# Altium PCB Sinistro_ASP_RevA.PcbDoc (part 3 of 5)
Units mm, origin at the board's own origin, x right, y up, seen from the top; angles counter-clockwise.
Board outline 150 x 110 mm, 8 copper layers (Top Layer (.GTL), MidLayer1 (.G1), +28V and VCC (.GP1), A and D grounds (.GP2), Earth GND (.GP3), +5ANA (.GP4), -5ANA (.GP5), Bottom Layer (.GBL)); 383 components, 275 nets, 1751 pads, 521 vias.
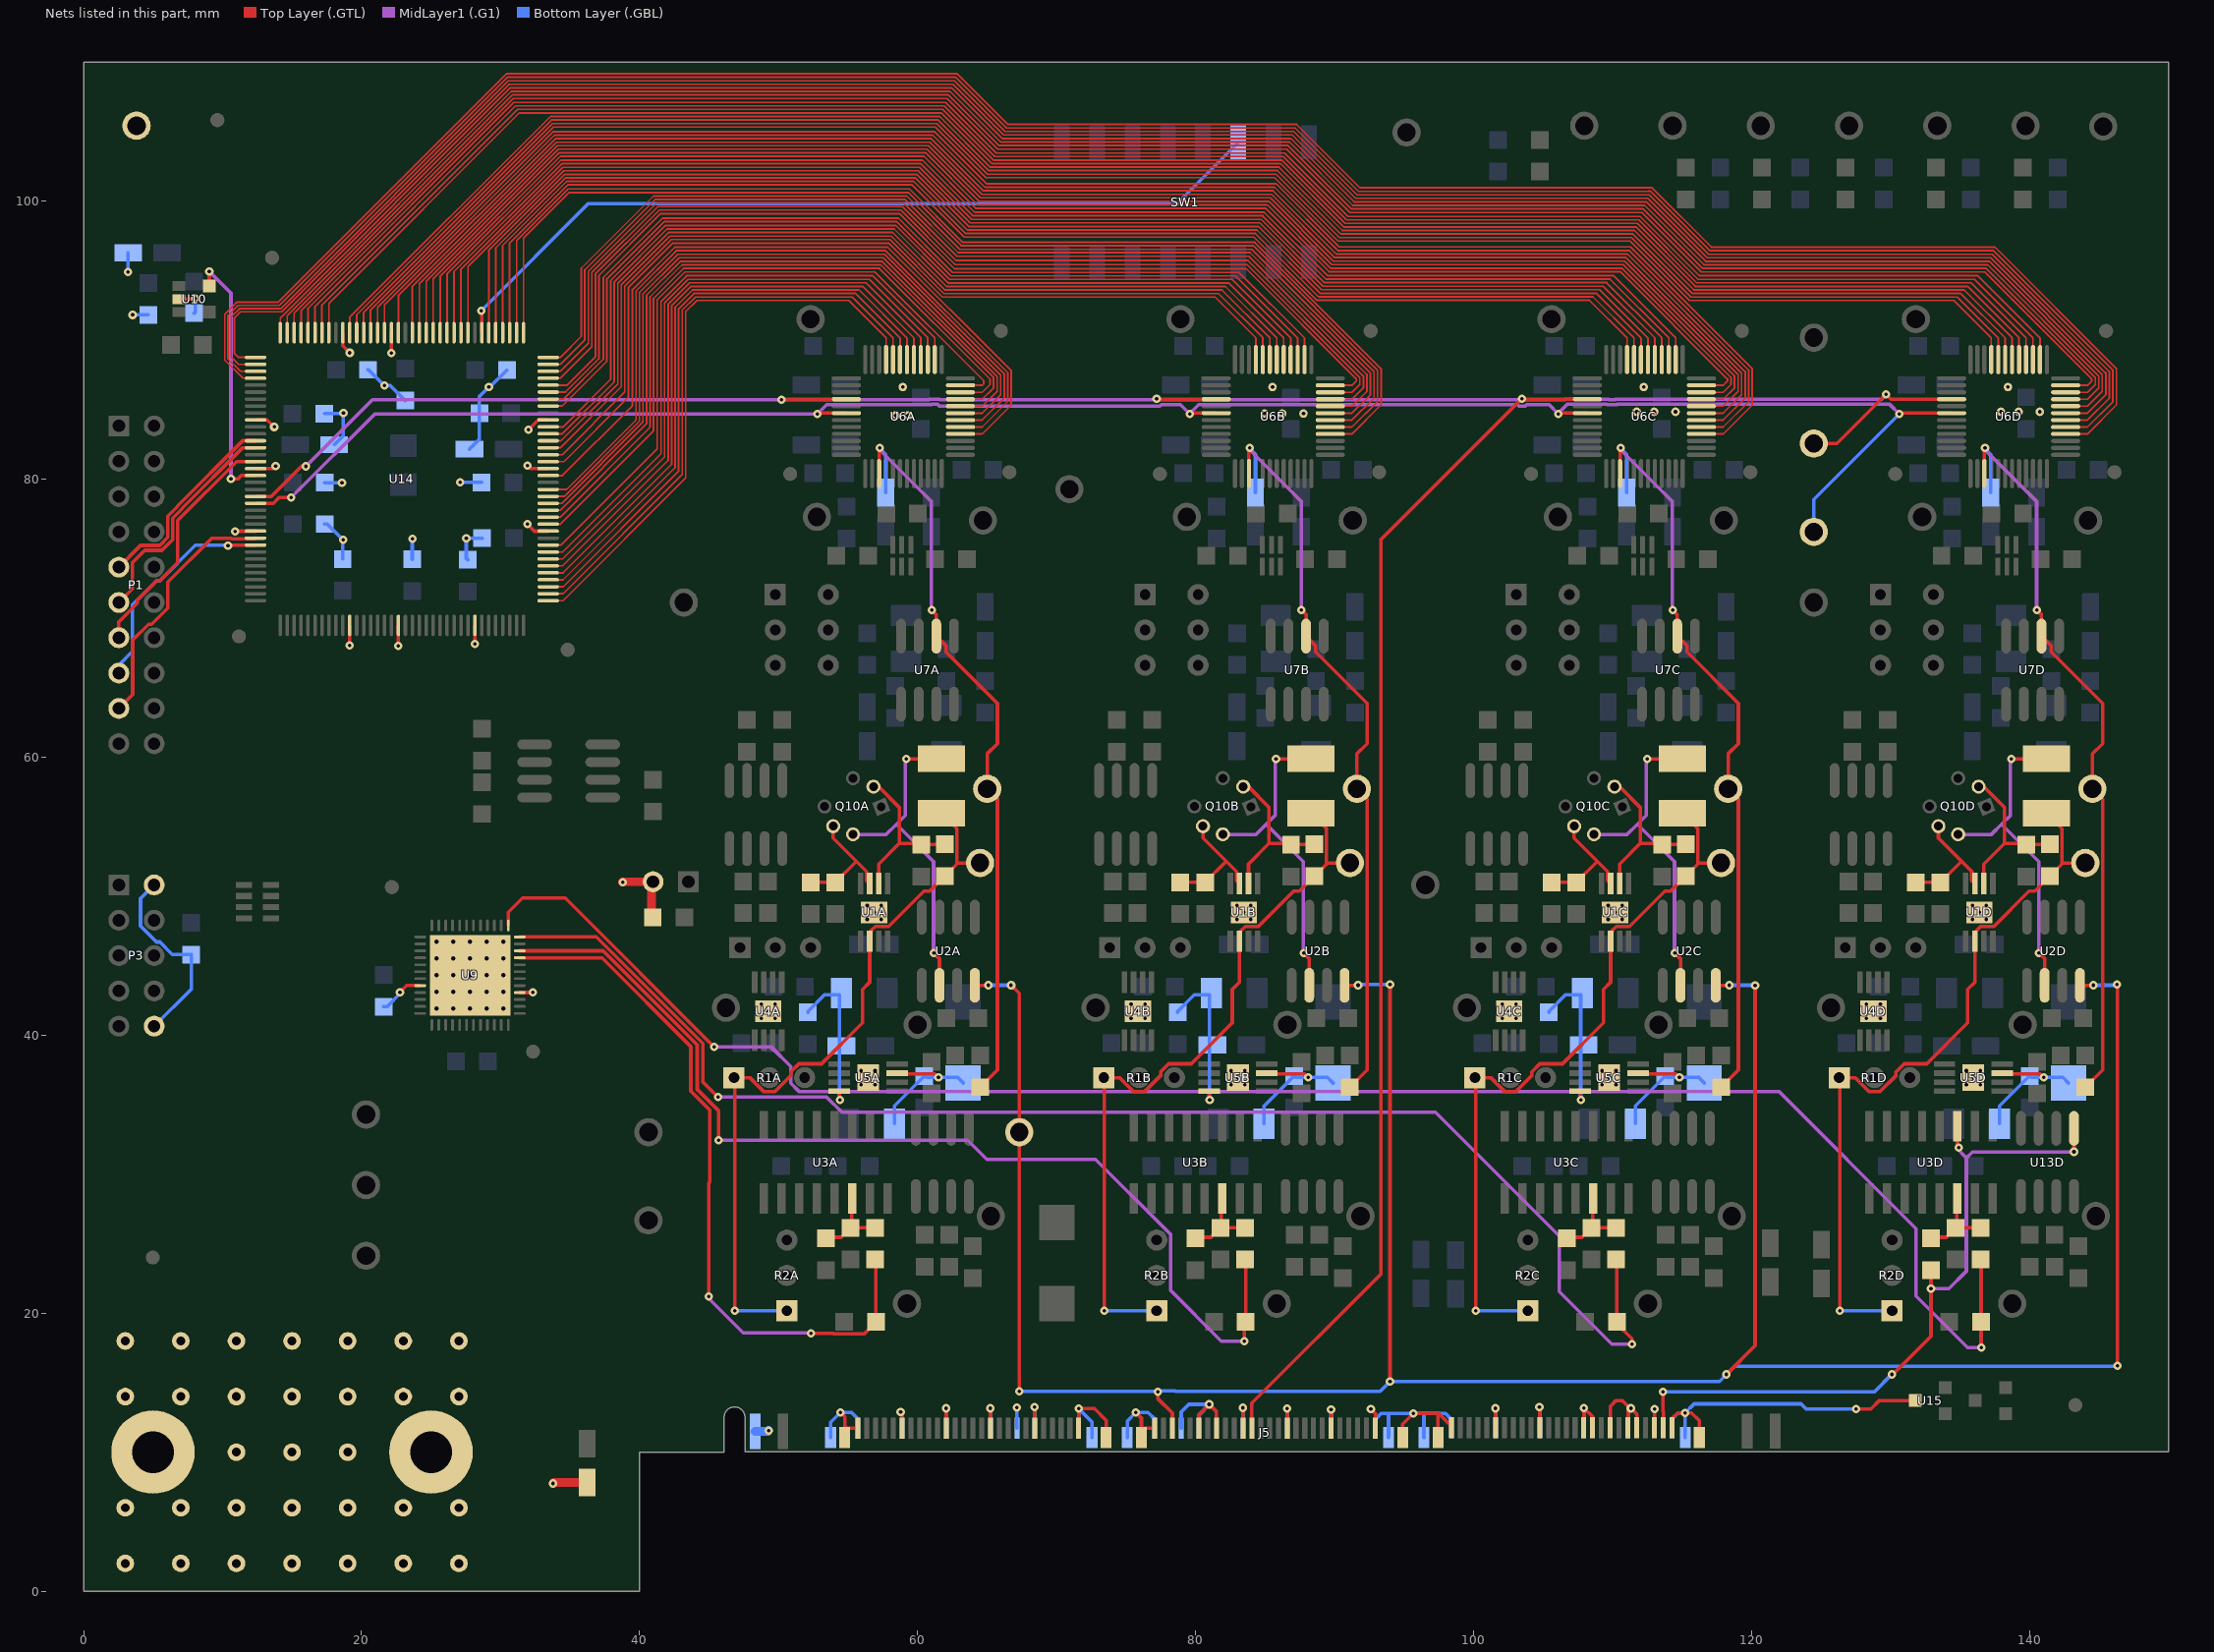
[diagram p9: the nets of this part, all layers, seen from the top]

## Via types
v1: diameter 0.61, hole 0.254, Top Layer (.GTL) to Bottom Layer (.GBL), 521 vias

## Nets (pads, with @x,y where several pads share a name; then routed paths per layer and width w, separated by ;. In a path a pad name is that pad's centre, name@x,y a point inside that pad or via, vN(x,y) a via of type N, cw(c..) or ccw(c..) an arc to the next point about the centre after c; other vN are vias at no path point) (continued)
CH4_OUT: J5.3 R13D.1 U3D.3 U13D.1 | length 51.8
  Top Layer (.GTL) w0.254: v1(113.614,14.351) 113.614,12.949 113.637,12.926 J5.3@113.637,11.756 ; v1@130.099,15.545 132.893,18.339 v1(132.893,21.776) R13D.1@132.893,23.097 ; U3D.3@134.798,33.444 134.798,31.834 134.864,31.9 v1(134.9,31.9) ; v1(143.18,31.606) U13D.1@143.18,33.294
  MidLayer1 (.G1) w0.254: v1@132.875,21.769 134.195,21.769 135.44,23.014 135.44,31.167 ; v1@134.78,31.828 135.44,31.167 ; v1@143.162,31.599 135.872,31.599 135.44,31.167
  Bottom Layer (.GBL) w0.254: v1(113.614,14.351) 114.122,14.351 128.829,14.351 v1(130.073,15.596)
CLK_100: U10.5 U14.18 | length 18.6
  Top Layer (.GTL) w0.254: U10.5@9.046,93.885 v1(9.046,94.926) ; v1@10.6,80.1 v1(10.6,80) 11.1,80 11.35,80.25 U14.18@12.375,80.25
  MidLayer1 (.G1) w0.254: v1(9.046,94.926) 10.6,93.372 v1(10.6,80)
CLK_ENBL: P1.15 U14.28 | length 16
  Top Layer (.GTL) w0.254: v1(10.389,75.209) 10.429,75.25 U14.28@12.375,75.25
  Bottom Layer (.GBL) w0.254: P1.15@2.54,66.04 2.54,66.623 3.519,67.601 3.519,70.943 5.257,72.681 5.485,72.681 8.039,75.235 10.414,75.235 v1(10.389,75.209)
COMMOUTA: C48A.1 R7A.2 TP9A.1 U6A.3 U7A.2 | length 55.7
  Top Layer (.GTL) w0.254: U6A.3@57.231,80.389 v1@57.231,82.18 ; v1(61.013,70.569) 61.343,70.239 U7A.2@61.343,68.701 62.035,68.01 62.035,67.562 65.738,63.859 65.738,60.968 65.001,60.232 TP9A.1@65.001,57.717 65.738,56.98 65.738,37.499 R7A.2@64.493,36.254
  MidLayer1 (.G1) w0.254: v1@57.213,82.173 60.995,78.391 v1@60.995,70.563
  Bottom Layer (.GBL) w0.254: v1@57.261,82.221 57.693,81.789 C48A.1@57.693,79.021
  other v1: 57.279,82.228
COMMOUTB: C48B.1 R7B.2 TP9B.1 U6B.3 U7B.2 | length 55.7
  Top Layer (.GTL) w0.254: U6B.3@83.831,80.389 v1@83.831,82.18 ; v1(87.613,70.569) 87.943,70.239 U7B.2@87.943,68.701 88.635,68.01 88.635,67.562 92.338,63.859 92.338,60.968 91.601,60.232 TP9B.1@91.601,57.717 92.338,56.98 92.338,37.499 R7B.2@91.093,36.254
  MidLayer1 (.G1) w0.254: v1@83.813,82.173 87.595,78.391 v1@87.595,70.563
  Bottom Layer (.GBL) w0.254: v1@83.861,82.221 84.293,81.789 C48B.1@84.293,79.021
  other v1: 83.879,82.228
COMMOUTC: C48C.1 R7C.2 TP9C.1 U6C.3 U7C.2 | length 55.7
  Top Layer (.GTL) w0.254: U6C.3@110.531,80.389 v1@110.531,82.18 ; v1(114.313,70.569) 114.643,70.239 U7C.2@114.643,68.701 115.335,68.01 115.335,67.562 119.038,63.859 119.038,60.968 118.301,60.232 TP9C.1@118.301,57.717 119.038,56.98 119.038,37.499 R7C.2@117.793,36.254
  MidLayer1 (.G1) w0.254: v1@110.513,82.173 114.295,78.391 v1@114.295,70.563
  Bottom Layer (.GBL) w0.254: v1@110.561,82.221 110.993,81.789 C48C.1@110.993,79.021
  other v1: 110.579,82.228
COMMOUTD: C48D.1 R7D.2 TP9D.1 U6D.3 U7D.2 | length 55.7
  Top Layer (.GTL) w0.254: U6D.3@136.731,80.389 v1@136.731,82.18 ; v1(140.513,70.569) 140.843,70.239 U7D.2@140.843,68.701 141.535,68.01 141.535,67.562 145.238,63.859 145.238,60.968 144.501,60.232 TP9D.1@144.501,57.717 145.238,56.98 145.238,37.499 R7D.2@143.993,36.254
  MidLayer1 (.G1) w0.254: v1@136.713,82.173 140.495,78.391 v1@140.495,70.563
  Bottom Layer (.GBL) w0.254: v1@136.761,82.221 137.193,81.789 C48D.1@137.193,79.021
  other v1: 136.779,82.228
CONVST_N: J5.81 TP26.1 U6A.40 U6B.40 U6C.40 U6D.40 U14.21 | length 227.9
  Top Layer (.GTL) w0.254: U14.21@12.375,78.75 13.523,78.75 15.684,80.912 v1(15.989,80.912) ; v1@50.208,85.739 U6A.40@54.881,85.739 ; v1@77.191,85.739 U6B.40@81.481,85.739 ; J5.81@84.038,11.729 84.038,13.527 ; 84.049,13.538 84.038,13.527 ; 93.32,22.885 93.32,22.809 ; v1@103.454,85.776 93.345,75.667 93.32,75.641 93.32,73.736 93.32,22.809 ; v1@103.48,85.739 U6C.40@108.181,85.739 ; TP26.1@124.46,82.55 126.136,82.55 v1(129.667,86.081) 130.009,85.739 U6D.40@134.381,85.739 ; 84.038,13.527 93.32,22.809
  MidLayer1 (.G1) w0.254: v1(15.989,80.912) 20.785,85.708 v1(50.208,85.708) 60.831,85.708 60.848,85.725 61.584,85.725 61.601,85.708 77.123,85.708 v1(77.191,85.776) 77.259,85.708 103.412,85.708 v1(103.48,85.776) 103.48,85.75 103.522,85.708 106.566,85.708 106.584,85.725 109.706,85.725 109.723,85.708 110.165,85.708 110.183,85.725 129.311,85.725 v1(129.667,86.081)
  Bottom Layer (.GBL) w0.254: v1@103.454,85.776 v1(103.48,85.776)
CS_N: TP23.1 U6A.42 U6B.42 U6C.42 U6D.42 U14.22 | length 143.8
  Top Layer (.GTL) w0.254: U14.22@12.393,78.232 U14.22@12.375,78.25 13.658,78.25 14.072,78.664 v1(14.935,78.664) ; v1@52.781,84.739 U6A.42@54.881,84.739 ; v1@79.578,84.739 U6B.42@81.481,84.739 ; v1@106.096,84.739 U6C.42@108.181,84.739 ; v1(130.607,84.684) 130.607,84.739 U6D.42@134.381,84.739
  MidLayer1 (.G1) w0.254: v1(14.935,78.664) 20.955,84.684 v1(52.781,84.684) 53.45,85.352 60.978,85.352 60.995,85.369 61.437,85.369 61.564,85.242 77.412,85.242 77.521,85.352 78.91,85.352 v1(79.578,84.684) 79.578,84.709 80.221,85.352 103.149,85.352 103.259,85.242 103.701,85.242 103.81,85.352 105.427,85.352 v1(106.096,84.684) 106.096,84.734 106.731,85.369 109.559,85.369 109.576,85.352 110.313,85.352 110.33,85.369 129.921,85.369 v1(130.607,84.684)
  Bottom Layer (.GBL) w0.254: TP23.1@124.46,76.2 124.46,78.537 v1(130.607,84.684)
DAT_STB: P1.9 U14.13 | length 14.5
  Top Layer (.GTL) w0.254: P1.9@2.54,73.66 4.101,75.221 5.485,75.221 6.059,75.795 6.059,77.329 6.77,78.04 6.77,78.071 11.449,82.75 U14.13@12.375,82.75
DB0: U6A.33 U14.73 | length 42.9
  Top Layer (.GTL) w0.127: U14.73@33.425,71.25 34.496,71.25 43.319,80.072 43.319,92.044 44.113,92.838 55.045,92.838 57.731,90.152 U6A.33@57.731,88.589
DB1: U6A.32 U14.74 | length 43.4
  Top Layer (.GTL) w0.127: U14.74@33.425,71.75 34.496,71.75 43.065,80.318 43.065,92.15 44.007,93.092 55.291,93.092 58.231,90.152 U6A.32@58.231,88.589
DB2: U6A.31 U14.75 | length 43.8
  Top Layer (.GTL) w0.127: U14.75@33.425,72.25 34.286,72.25 34.496,72.25 42.811,80.564 42.811,92.255 43.902,93.346 55.537,93.346 58.731,90.152 U6A.31@58.731,88.589
DB3: U6A.30 U14.76 | length 44.2
  Top Layer (.GTL) w0.127: U14.76@33.425,72.75 34.286,72.75 34.496,72.75 42.557,80.81 42.557,92.36 43.797,93.6 55.783,93.6 59.231,90.152 U6A.30@59.231,88.589
DB4: U6A.29 U14.77 | length 44.6
  Top Layer (.GTL) w0.127: U14.77@33.425,73.25 34.286,73.25 34.496,73.25 42.303,81.056 42.303,92.465 43.692,93.854 56.029,93.854 59.731,90.152 U6A.29@59.731,88.589
DB5: U6A.28 U14.78 | length 45
  Top Layer (.GTL) w0.127: U14.78@33.425,73.75 34.286,73.75 34.46,73.75 42.049,81.338 42.049,92.571 43.586,94.108 56.275,94.108 60.231,90.152 U6A.28@60.231,88.589
DB6: U6A.27 U14.79 | length 45.4
  Top Layer (.GTL) w0.127: U14.79@33.425,74.25 34.286,74.25 34.46,74.25 41.795,81.584 41.795,92.676 43.481,94.362 56.521,94.362 60.731,90.152 U6A.27@60.731,88.589
DB7: U6A.26 U14.80 | length 45.9
  Top Layer (.GTL) w0.127: U14.80@33.425,74.75 34.286,74.75 34.46,74.75 41.541,81.83 41.541,92.781 43.376,94.616 56.767,94.616 61.231,90.152 U6A.26@61.231,88.589
DB8: U6A.23 U14.81 | length 50.9
  Top Layer (.GTL) w0.127: U14.81@33.425,75.25 34.336,75.25 41.261,82.175 41.261,92.897 43.26,94.896 56.924,94.896 64.76,87.06 64.76,86.854 64.645,86.739 U6A.23@63.081,86.739
DB9: U6A.22 U14.84 | length 51
  Top Layer (.GTL) w0.127: U14.84@33.425,76.75 34.286,76.75 41.007,83.471 41.007,93.002 43.156,95.151 57.249,95.151 57.25,95.15 65.211,87.189 65.211,86.805 64.645,86.239 U6A.22@63.081,86.239
DB10: U6A.21 U14.85 | length 51.9
  Top Layer (.GTL) w0.127: U14.85@33.425,77.25 34.286,77.25 40.753,83.717 40.753,93.107 43.051,95.405 57.352,95.405 57.352,95.404 65.465,87.291 65.466,87.29 65.466,86.56 64.645,85.739 U6A.21@63.081,85.739
DB11: U6A.20 U14.86 | length 52.7
  Top Layer (.GTL) w0.127: U14.86@33.425,77.75 34.286,77.75 40.499,83.963 40.499,93.212 42.946,95.659 57.421,95.659 65.72,87.36 65.72,86.314 64.645,85.239 U6A.20@63.081,85.239
DB12: U6A.19 U14.87 | length 53.6
  Top Layer (.GTL) w0.127: U14.87@33.425,78.25 34.398,78.25 40.245,84.097 40.245,93.317 42.839,95.912 57.535,95.912 65.973,87.474 65.973,86.067 64.645,84.739 U6A.19@63.081,84.739
DB13: U6A.18 U14.88 | length 54.6
  Top Layer (.GTL) w0.127: U14.88@33.425,78.75 34.575,78.75 39.991,84.166 39.991,93.423 42.734,96.166 57.636,96.166 66.227,87.575 66.227,85.821 64.645,84.239 U6A.18@63.081,84.239
DB14: U6A.17 U14.89 | length 55.5
  Top Layer (.GTL) w0.127: U14.89@33.425,79.25 34.752,79.25 39.737,84.236 39.737,93.528 42.63,96.421 57.704,96.421 66.482,87.643 66.482,85.576 64.645,83.739 U6A.17@63.081,83.739
DB15: U6A.16 U14.91 | length 55.7
  Top Layer (.GTL) w0.127: U14.91@33.425,80.25 34.454,80.25 39.483,85.279 39.483,93.633 42.524,96.674 57.846,96.674 66.735,87.785 66.735,85.329 64.645,83.239 U6A.16@63.081,83.239
DB16: U6B.33 U14.93 | length 66.4
  Top Layer (.GTL) w0.127: U14.93@33.425,81.25 34.565,81.25 39.191,85.876 39.191,93.754 42.403,96.966 57.897,96.966 61.779,93.084 81.399,93.084 84.331,90.152 U6B.33@84.331,88.589
DB17: U6B.32 U14.94 | length 66.8
  Top Layer (.GTL) w0.127: U14.94@33.425,81.75 34.43,81.75 38.937,86.257 38.937,93.859 42.298,97.22 58.002,97.22 61.884,93.338 81.645,93.338 84.831,90.152 U6B.32@84.831,88.589
DB18: U6B.31 U14.95 | length 67.1
  Top Layer (.GTL) w0.127: U14.95@33.425,82.25 34.295,82.25 38.683,86.638 38.683,93.965 42.192,97.474 58.108,97.474 61.99,93.592 81.891,93.592 85.331,90.152 U6B.31@85.331,88.589
DB19: U6B.30 U14.96 | length 67.5
  Top Layer (.GTL) w0.127: U14.96@33.425,82.75 34.338,82.75 38.429,86.841 38.429,94.07 42.087,97.728 58.213,97.728 62.095,93.846 82.137,93.846 85.831,90.152 U6B.30@85.831,88.589
DB20: U6B.29 U14.97 | length 68
  Top Layer (.GTL) w0.127: U14.97@33.425,83.25 34.431,83.25 38.175,86.994 38.175,94.175 41.982,97.982 58.318,97.982 62.2,94.1 82.383,94.1 86.331,90.152 U6B.29@86.331,88.589
DB21: U6B.28 U14.98 | length 68.5
  Top Layer (.GTL) w0.127: U14.98@33.425,83.75 34.499,83.75 37.921,87.172 37.921,94.28 41.877,98.236 58.423,98.236 62.305,94.354 82.629,94.354 86.831,90.152 U6B.28@86.831,88.589
DB22: U6B.27 U14.101 | length 67.9
  Top Layer (.GTL) w0.127: U14.101@33.425,85.25 34.425,85.25 37.649,88.474 37.649,94.393 41.764,98.508 58.51,98.508 62.411,94.607 62.584,94.607 ; U6B.27@87.331,88.589 87.331,90.152 82.875,94.608 62.585,94.608 ; 62.584,94.607 62.585,94.608
DB23: U6B.26 U14.102 | length 68.4
  Top Layer (.GTL) w0.127: U14.102@33.425,85.75 34.518,85.75 37.395,88.627 37.395,94.498 41.659,98.762 58.616,98.762 62.516,94.862 83.121,94.862 87.831,90.152 U6B.26@87.831,88.589
DB24: U6B.23 U14.103 | length 74
  Top Layer (.GTL) w0.127: U14.103@33.425,86.25 34.663,86.25 37.073,88.66 37.073,94.631 41.526,99.084 58.679,99.084 62.643,95.12 83.637,95.12 91.557,87.2 91.557,87.051 91.245,86.739 U6B.23@89.681,86.739
DB25: U6B.22 U14.104 | length 74.9
  Top Layer (.GTL) w0.127: U14.104@33.425,86.75 34.782,86.75 36.819,88.787 36.819,94.737 41.421,99.339 58.783,99.339 62.702,95.42 83.696,95.42 91.812,87.304 91.812,87.131 91.811,87.13 91.811,87.12 91.812,87.119 91.812,86.806 91.245,86.239 U6B.22@89.681,86.239
DB26: U6B.21 U14.105 | length 75.5
  Top Layer (.GTL) w0.127: U14.105@33.425,87.25 34.286,87.25 36.565,89.529 36.565,94.842 41.315,99.592 58.89,99.592 62.762,95.72 83.755,95.72 92.065,87.41 92.065,86.559 91.245,85.739 U6B.21@89.681,85.739
DB27: U6B.20 U14.106 | length 76.3
  Top Layer (.GTL) w0.127: U14.106@33.425,87.75 34.286,87.75 36.311,89.775 36.311,94.947 41.21,99.846 58.995,99.846 62.821,96.02 83.814,96.02 92.32,87.514 92.32,86.314 91.245,85.239 U6B.20@89.681,85.239
DB28: U6B.19 U14.107 | length 77.2
  Top Layer (.GTL) w0.127: U14.107@33.425,88.25 34.286,88.25 36.057,90.021 36.057,95.052 41.105,100.1 59.1,100.1 62.914,96.286 83.907,96.286 92.573,87.62 92.573,86.067 91.245,84.739 U6B.19@89.681,84.739
DB29: U6B.18 U14.108 | length 78
  Top Layer (.GTL) w0.127: U14.108@33.425,88.75 34.286,88.75 35.803,90.267 35.803,95.158 40.999,100.354 59.205,100.354 63.039,96.52 84.033,96.52 92.827,87.726 92.827,85.821 91.245,84.239 U6B.18@89.681,84.239
DB30: U6B.17 U14.109 | length 81.3
  Top Layer (.GTL) w0.127: U14.109@31.65,90.525 31.65,97.334 34.924,100.608 59.31,100.608 63.129,96.79 84.122,96.79 93.081,87.831 93.081,85.575 91.245,83.739 U6B.17@89.681,83.739
DB31: U6B.16 U14.110 | length 82.8
  Top Layer (.GTL) w0.127: U14.110@31.15,90.525 31.15,97.158 34.854,100.862 59.416,100.862 63.258,97.02 84.251,97.02 93.335,87.936 93.335,85.329 91.245,83.239 U6B.16@89.681,83.239
DB32: U6C.33 U14.111 | length 94.7
  Top Layer (.GTL) w0.127: U14.111@30.65,90.525 30.65,96.981 34.825,101.156 59.607,101.156 63.357,97.406 84.191,97.406 88.742,92.855 108.329,92.855 111.031,90.152 U6C.33@111.031,88.589
DB33: U6C.32 U14.112 | length 95.8
  Top Layer (.GTL) w0.127: U14.112@30.15,90.525 30.15,96.804 34.755,101.41 59.712,101.41 63.462,97.66 84.296,97.66 88.847,93.109 108.575,93.109 111.531,90.152 U6C.32@111.531,88.589
DB34: U6C.31 U14.113 | length 96.9
  Top Layer (.GTL) w0.127: U14.113@29.65,90.525 29.65,96.628 34.686,101.664 59.818,101.664 63.568,97.913 63.741,97.913 ; U6C.31@112.031,88.589 112.031,90.152 108.821,93.363 89.127,93.363 89.126,93.362 88.954,93.362 84.402,97.914 63.742,97.914 ; 63.741,97.913 63.742,97.914
DB35: U6C.30 U14.114 | length 98
  Top Layer (.GTL) w0.127: U14.114@29.15,90.525 29.15,96.451 34.617,101.918 59.923,101.918 63.673,98.168 84.507,98.168 89.058,93.617 109.067,93.617 112.531,90.152 U6C.30@112.531,88.589
DB36: U6C.29 U14.117 | length 99.5
  Top Layer (.GTL) w0.127: U14.117@27.65,90.525 27.65,95.274 34.548,102.173 60.027,102.173 60.028,102.172 63.778,98.422 63.779,98.423 84.611,98.423 84.612,98.422 89.163,93.871 109.313,93.871 113.031,90.152 U6C.29@113.031,88.589
DB37: U6C.28 U14.118 | length 100.6
  Top Layer (.GTL) w0.127: U14.118@27.15,90.525 27.15,95.097 34.478,102.426 60.133,102.426 63.883,98.676 84.717,98.676 89.268,94.125 109.559,94.125 113.531,90.152 U6C.28@113.531,88.589
DB38: U6C.27 U14.119 | length 101.7
  Top Layer (.GTL) w0.127: U14.119@26.65,90.525 26.65,94.921 34.409,102.68 60.238,102.68 63.988,98.93 84.822,98.93 89.373,94.379 109.805,94.379 114.031,90.152 U6C.27@114.031,88.589
DB39: U6C.26 U14.120 | length 102.9
  Top Layer (.GTL) w0.127: U14.120@26.15,90.525 26.15,94.744 34.34,102.934 60.344,102.934 64.094,99.184 84.928,99.184 89.479,94.633 110.051,94.633 114.531,90.152 U6C.26@114.531,88.589
DB40: U6C.23 U14.121 | length 109
  Top Layer (.GTL) w0.127: U14.121@25.65,90.525 25.65,94.567 34.296,103.213 60.459,103.213 64.209,99.463 85.043,99.463 89.594,94.912 110.545,94.912 118.257,87.2 118.257,87.051 117.945,86.739 U6C.23@116.381,86.739
DB41: U6C.22 U14.122 | length 110.5
  Top Layer (.GTL) w0.127: U14.122@25.15,90.525 25.15,94.391 34.226,103.467 60.565,103.467 64.315,99.717 85.149,99.717 89.7,95.166 110.65,95.166 118.511,87.305 118.511,86.805 117.945,86.239 U6C.22@116.381,86.239
DB42: U6C.21 U14.123 | length 112.1
  Top Layer (.GTL) w0.127: U14.123@24.65,90.525 24.65,94.214 34.157,103.721 60.67,103.721 64.42,99.971 85.254,99.971 89.805,95.42 110.755,95.42 118.765,87.41 118.765,86.559 117.945,85.739 U6C.21@116.381,85.739
DB43: U6C.20 U14.124 | length 113.6
  Top Layer (.GTL) w0.127: U14.124@24.15,90.525 24.15,94.037 34.088,103.975 60.775,103.975 64.525,100.225 85.359,100.225 89.91,95.674 110.86,95.674 119.019,87.515 119.019,86.313 117.945,85.239 U6C.20@116.381,85.239
DB44: U6C.19 U14.125 | length 115.1
  Top Layer (.GTL) w0.127: U14.125@23.65,90.525 23.65,93.86 34.019,104.229 60.88,104.229 64.63,100.479 85.464,100.479 90.015,95.928 110.965,95.928 119.273,87.62 119.273,86.067 117.945,84.739 U6C.19@116.381,84.739
DB45: U6C.18 U14.127 | length 116.9
  Top Layer (.GTL) w0.127: U14.127@22.65,90.525 22.65,93.184 33.949,104.483 60.985,104.483 64.735,100.733 85.569,100.733 90.12,96.182 111.071,96.182 119.527,87.726 119.527,85.821 117.945,84.239 U6C.18@116.381,84.239
DB46: U6C.17 U14.129 | length 118.6
  Top Layer (.GTL) w0.127: U14.129@21.65,90.525 21.65,92.512 33.875,104.737 61.091,104.737 64.841,100.987 85.675,100.987 90.226,96.436 111.176,96.436 119.781,87.831 119.781,85.575 117.945,83.739 U6C.17@116.381,83.739
DB47: U6C.16 U14.130 | length 120.1
  Top Layer (.GTL) w0.127: U14.130@21.15,90.525 21.15,92.335 33.806,104.991 61.196,104.991 64.946,101.241 85.78,101.241 90.331,96.69 111.281,96.69 120.035,87.936 120.035,85.329 117.945,83.239 U6C.16@116.381,83.239
DB48: U6D.33 U14.131 | length 131.5
  Top Layer (.GTL) w0.127: U14.131@20.65,90.525 20.65,92.159 33.805,105.314 61.272,105.314 64.914,101.672 85.675,101.672 90.234,97.114 111.237,97.114 115.512,92.838 134.545,92.838 137.231,90.152 U6D.33@137.231,88.589
DB49: U6D.32 U14.132 | length 132.6
  Top Layer (.GTL) w0.127: U14.132@20.15,90.525 20.15,91.991 33.727,105.568 61.377,105.568 65.019,101.926 85.78,101.926 90.339,97.368 111.342,97.368 115.617,93.092 134.791,93.092 137.731,90.152 U6D.32@137.731,88.589
DB50: U6D.31 U14.133 | length 133.7
  Top Layer (.GTL) w0.127: U14.133@19.65,90.525 19.65,91.814 33.657,105.822 61.482,105.822 65.124,102.18 85.886,102.18 90.444,97.622 111.447,97.622 115.722,93.346 135.037,93.346 138.231,90.152 U6D.31@138.231,88.589
DB51: U6D.30 U14.134 | length 134.8
  Top Layer (.GTL) w0.127: U14.134@19.15,90.525 19.15,91.638 33.588,106.076 61.588,106.076 65.23,102.433 65.403,102.433 65.404,102.434 85.991,102.434 90.549,97.876 111.552,97.876 115.827,93.6 135.283,93.6 138.731,90.152 U6D.30@138.731,88.589
DB52: U6D.29 U14.137 | length 137.6
  Top Layer (.GTL) w0.127: U14.137@17.65,90.525 17.65,92.631 31.349,106.33 61.693,106.33 65.334,102.688 86.096,102.688 90.654,98.13 111.657,98.13 115.933,93.854 135.529,93.854 139.231,90.152 U6D.29@139.231,88.589
DB53: U6D.28 U14.138 | length 138.8
  Top Layer (.GTL) w0.127: U14.138@17.15,90.525 17.15,92.512 31.223,106.585 61.797,106.585 65.44,102.942 86.201,102.942 90.76,98.384 111.763,98.384 116.038,94.108 135.46,94.108 135.461,94.109 135.774,94.109 139.731,90.152 U6D.28@139.731,88.589
DB54: U6D.27 U14.139 | length 139.9
  Top Layer (.GTL) w0.127: U14.139@16.65,90.525 16.65,92.418 31.069,106.838 61.903,106.838 65.545,103.196 86.306,103.196 90.865,98.638 111.868,98.638 116.143,94.362 136.021,94.362 140.231,90.152 U6D.27@140.231,88.589
DB55: U6D.26 U14.140 | length 141.1
  Top Layer (.GTL) w0.127: U14.140@16.15,90.525 16.15,92.288 30.954,107.092 62.008,107.092 65.65,103.45 86.412,103.45 90.97,98.892 111.973,98.892 116.248,94.616 135.952,94.616 135.953,94.617 136.266,94.617 140.731,90.152 U6D.26@140.731,88.589
DB56: U6D.23 U14.141 | length 147.2
  Top Layer (.GTL) w0.127: U14.141@15.65,90.525 15.65,92.111 30.91,107.371 62.124,107.371 65.766,103.729 86.527,103.729 91.087,99.17 91.259,99.17 ; U6D.23@142.581,86.739 144.145,86.739 144.457,87.051 144.457,87.2 136.761,94.896 116.538,94.896 116.538,94.895 116.365,94.895 112.089,99.171 91.26,99.171 ; 91.259,99.17 91.26,99.171
DB57: U6D.22 U14.142 | length 148.8
  Top Layer (.GTL) w0.127: U14.142@15.15,90.525 15.15,91.934 30.841,107.625 62.229,107.625 65.871,103.983 86.632,103.983 91.191,99.425 ; U6D.22@142.581,86.239 144.145,86.239 144.711,86.805 144.711,87.305 136.866,95.15 116.469,95.15 112.194,99.425 112.193,99.424 91.192,99.424 ; 91.191,99.425 91.192,99.424
DB58: U6D.21 U14.143 | length 150.3
  Top Layer (.GTL) w0.127: U14.143@14.65,90.525 14.65,91.757 30.773,107.881 32.985,107.881 32.987,107.879 40.95,107.879 62.335,107.879 65.976,104.237 86.563,104.237 86.564,104.238 86.737,104.238 ; U6D.21@142.581,85.739 144.145,85.739 144.965,86.559 144.965,87.41 136.971,95.404 116.749,95.404 116.748,95.403 116.575,95.403 116.574,95.404 112.299,99.679 112.298,99.68 112.126,99.68 112.124,99.678 91.297,99.678 ; 86.737,104.238 86.738,104.237 ; 86.738,104.237 91.296,99.679 ; 91.296,99.679 91.297,99.678
DB59: U6D.20 U14.144 | length 151.8
  Top Layer (.GTL) w0.127: U14.144@14.15,90.525 14.15,91.581 30.702,108.133 62.44,108.133 66.081,104.491 86.668,104.491 ; U6D.20@142.581,85.239 144.145,85.239 145.219,86.313 145.219,87.515 137.076,95.658 116.854,95.658 116.853,95.657 116.68,95.657 116.68,95.658 112.404,99.933 91.401,99.933 86.843,104.491 86.842,104.492 86.669,104.492 ; 86.668,104.491 86.669,104.492
DB60: U6D.19 U14.1 | length 159.4
  Top Layer (.GTL) w0.127: U14.1@12.375,88.75 11.148,88.75 10.846,89.052 10.846,91.567 11.303,92.024 14.27,92.024 30.633,108.387 62.545,108.387 66.187,104.745 86.774,104.745 ; U6D.19@142.581,84.739 144.145,84.739 145.473,86.067 145.473,87.62 137.182,95.912 116.959,95.912 116.958,95.911 116.786,95.911 116.785,95.912 112.51,100.187 112.509,100.188 112.336,100.188 112.335,100.187 91.507,100.187 86.947,104.746 86.775,104.746 ; 86.774,104.745 86.775,104.746
DB61: U6D.18 U14.2 | length 161.4
  Top Layer (.GTL) w0.127: U14.2@12.375,88.25 11.14,88.25 10.617,88.773 10.617,91.662 11.208,92.253 14.175,92.253 30.564,108.641 62.65,108.641 66.292,104.999 87.053,104.999 91.612,100.441 112.44,100.441 112.441,100.442 112.614,100.442 112.615,100.441 116.89,96.166 116.891,96.165 137.286,96.165 137.287,96.166 145.727,87.726 145.727,85.821 144.145,84.239 U6D.18@142.581,84.239
DB62: U6D.17 U14.3 | length 163.3
  Top Layer (.GTL) w0.127: U14.3@12.375,87.75 11.285,87.75 10.389,88.646 10.389,91.756 11.114,92.481 14.081,92.481 30.494,108.895 62.755,108.895 66.397,105.253 87.159,105.253 91.717,100.695 112.546,100.695 112.546,100.696 112.719,100.696 112.72,100.695 116.995,96.42 137.392,96.42 145.981,87.831 145.981,85.575 144.145,83.739 U6D.17@142.581,83.739
DB63: U6D.16 U14.4 | length 165.2
  Top Layer (.GTL) w0.127: U14.4@12.375,87.25 11.454,87.25 10.16,88.544 10.16,91.851 11.019,92.71 13.986,92.71 30.425,109.149 62.861,109.149 66.502,105.507 87.264,105.507 91.822,100.949 112.651,100.949 112.652,100.95 112.824,100.95 112.825,100.949 117.1,96.674 137.497,96.674 146.235,87.936 146.235,85.329 144.145,83.239 U6D.16@142.581,83.239
DC_HOLD: J5.99 TP22.1 U2A.8 U2B.8 U2C.8 U2D.8 | length 208.5
  Top Layer (.GTL) w0.254: U2A.8@64.112,43.583 65.079,43.583 v1(65.084,43.588) ; v1(66.726,43.588) 67.31,43.004 TP22.1@67.31,33.02 v1(67.31,14.376) ; v1(77.267,14.351) 77.267,13.868 78.323,12.813 J5.99@78.323,11.729 ; U2B.8@90.712,43.583 v1@91.679,43.583 ; v1(93.98,15.088) v1(93.98,43.637) ; U2C.8@117.412,43.583 118.379,43.583 v1(118.384,43.588) ; v1(118.186,15.596) 120.244,17.653 v1(120.244,43.561) ; U2D.8@143.612,43.583 144.579,43.583 v1(144.584,43.588) ; v1(146.279,43.637) 146.304,43.612 v1(146.304,16.205)
  Bottom Layer (.GBL) w0.254: v1(65.084,43.588) v1(66.726,43.588) ; v1(67.31,14.376) 77.241,14.376 v1(77.267,14.351) 77.318,14.402 78.529,14.402 78.555,14.376 93.269,14.376 v1(93.98,15.088) 117.678,15.088 v1(118.186,15.596) 118.77,16.18 146.279,16.18 v1(146.304,16.205) ; v1(91.684,43.588) 91.733,43.637 v1(93.98,43.637) ; v1(118.384,43.588) v1@120.244,43.588 ; v1(144.584,43.588) v1@146.279,43.588
DFF_ENBL: P1.17 U14.27 | length 18.3
  Top Layer (.GTL) w0.254: P1.17@2.54,63.5 3.531,64.491 3.531,68.415 4.675,69.559 4.903,69.559 6.059,70.715 6.059,72.581 9.22,75.743 10.61,75.743 10.66,75.692 12.317,75.692 U14.27@12.375,75.75
E: pad.0 pad.1 pad.2 pad.3 pad.4 pad.5 U1A.0 U1B.0 U1C.0 U1D.0 U4A.0 U4B.0 U4C.0 U4D.0 U5A.0 U5B.0 U5C.0 U5D.0 U9.0
END: P1.13 U14.16 | length 17.7
  Top Layer (.GTL) w0.254: P1.13@2.54,68.58 2.54,69.736 3.874,71.07 3.874,71.298 5.257,72.681 5.485,72.681 6.77,73.966 6.77,77.019 11,81.25 U14.16@12.375,81.25
GND: C2.1 C27.1 C32.2 C33.1 C34.1 C36.1 C37.1 C38.1 C39.1 C40.1 C41.1 C42.1 C43.1 C44.2 C45.2 C47.1 C50.1 C51.1 C52.1 C55.2 C56.2 J5.1 J5.2 J5.5 J5.9 J5.11 J5.12 J5.15 J5.19 J5.21 J5.22 J5.31 J5.32 J5.41 J5.42 J5.51 J5.52 J5.53 J5.54 J5.63 J5.64 J5.73 J5.74 J5.83 J5.84 J5.89 J5.93 J5.94 J5.98 J5.103 J5.104 J5.105 J5.106 J5.115 J5.116 J5.120 J5.125 J5.126 J5.135 J5.136 J5.145 J5.146 J5.155 J5.156 J5.157 J5.158 J5.159 J5.160 J5.161 J5.162 J5.163 J5.164 J5.165 J5.166 J5.167 J5.168 J5.PC08 P2.2 P3.2 P3.10 SW1.14 TP18.1 U9.8 U9.28 U10.2 U14.10 U14.17 U14.26 U14.47 U14.54 U14.65 U14.83 U14.92 U14.99 U14.115 U14.128 U14.135 U15.3 | length 251.2
  Top Layer (.GTL) w0.254: U10.2@6.862,92.945 8.005,92.945 v1(8.03,92.97) ; v1(10.897,76.225) 10.921,76.25 U14.26@12.375,76.25 ; U14.17@12.375,80.75 13.643,80.75 v1(13.818,80.924) ; U14.10@12.375,84.25 13.21,84.25 v1(13.716,83.744) ; U14.135@18.65,90.525 18.65,89.579 v1(19.152,89.078) ; v1(19.126,68.021) 19.15,68.045 U14.47@19.15,69.475 ; v1(22.149,89.052) 22.15,89.054 U14.128@22.15,90.525 ; v1(22.631,67.996) 22.65,68.014 U14.54@22.65,69.475 ; v1(22.758,43.078) 22.766,43.078 23.249,43.561 24.224,43.561 U9.8@24.225,43.56 ; v1(28.143,68.148) 28.15,68.155 U14.65@28.15,69.475 ; v1(28.6,92.1) 28.65,92.051 U14.115@28.65,90.525 ; U9.28@31.375,43.06 32.29,43.06 v1(32.309,43.078) ; v1(31.928,76.757) 32.435,76.25 U14.83@33.425,76.25 ; v1(31.928,80.975) 32.153,80.75 U14.92@33.425,80.75 ; v1(32.004,83.541) 32.713,84.25 U14.99@33.425,84.25 ; v1(54.458,12.852) 54.76,12.55 54.76,11.9 ; J5.167@54.76,11.044 54.76,11.9 ; J5.155@55.713,11.729 54.931,11.729 54.76,11.9 ; v1(58.776,12.903) 58.888,12.791 J5.145@58.888,11.729 ; v1(62.052,13.157) 62.063,13.147 J5.135@62.063,11.729 ; v1(65.227,13.157) 65.238,13.147 J5.125@65.238,11.729 ; J5.115@68.413,11.729 v1(68.413,13.244) ; J5.105@71.588,11.729 71.588,13.121 v1(71.577,13.132) 72.72,13.132 73.556,12.296 J5.165@73.556,11.044 ; v1(75.692,12.852) 76.096,12.448 J5.163@76.096,11.8 ; J5.163@76.096,11.044 J5.163@76.096,11.8 ; J5.103@77.053,11.729 76.167,11.729 J5.163@76.096,11.8 ; J5.93@80.228,11.729 80.228,12.689 v1(80.975,13.437) 81.498,12.914 J5.89@81.498,11.729 ; J5.83@83.403,11.729 v1(83.403,13.194) ; v1(86.563,13.132) 86.578,13.117 J5.73@86.578,11.729 ; v1(89.738,13.056) 89.753,13.041 J5.63@89.753,11.729 ; v1(92.6,13.1) 92.928,12.772 J5.53@92.928,11.729 ; J5.161@94.892,11.044 94.892,12.012 v1(95.656,12.776) 97.485,12.776 ; J5.159@97.432,11.044 97.432,12.723 97.485,12.776 ; J5.51@98.397,11.756 98.397,11.864 97.485,12.776 ; J5.41@101.575,11.759 v1(101.575,13.157) ; v1(104.724,13.233) 104.747,13.21 J5.31@104.747,11.756 ; J5.21@107.925,11.759 v1(107.925,13.183) 108.557,12.55 J5.19@108.557,11.756 ; J5.15@109.827,11.756 109.827,13.3 110.244,13.716 110.686,13.716 111.244,13.157 v1(111.303,13.157) ; J5.11@111.097,11.756 111.097,12.952 v1(111.303,13.157) ; J5.9@111.732,11.756 111.732,12.728 v1(111.303,13.157) ; v1(113,13.1) v1(113,13.1) J5.5@113.002,11.756 ; J5.1@114.272,11.756 114.272,12.418 114.681,12.827 v1(115.214,12.827) 115.672,12.827 116.228,12.271 J5.157@116.228,11.044 ; v1(127.508,13.106) 128.575,13.106 129.184,13.716 U15.3@131.75,13.716
  Top Layer (.GTL) w0.635: v1(33.782,7.747) 33.858,7.823 C55.2@36.22,7.823 ; v1(38.786,51.003) 38.811,51.029 40.843,51.029 C56.2@40.843,48.565
  Bottom Layer (.GBL) w0.127: v1@18.669,84.709 v1(18.694,84.734)
  Bottom Layer (.GBL) w0.254: v1(3.2,94.9) C32.2@3.2,96.266 ; v1(3.534,91.802) C27.1@4.652,91.802 ; P3.10@5.08,40.64 7.747,43.307 C33.1@7.747,45.796 6.388,45.796 5.485,46.699 5.257,46.699 4.101,47.855 4.101,49.821 P3.2@5.08,50.8 ; C2.1@7.954,91.929 8.03,92.005 v1(8.03,92.97) ; C37.1@17.323,84.709 18.669,84.709 18.669,83.109 C45.2@18.034,82.474 ; C38.1@17.348,76.759 17.526,76.759 v1(18.669,75.616) 18.644,75.59 C47.1@18.644,74.244 ; C40.1@17.348,79.731 v1(18.593,79.731) ; C39.1@20.447,87.859 20.498,87.859 v1(21.641,86.716) 22.073,86.716 C41.1@23.139,85.649 ; C36.1@21.59,42.037 21.819,42.037 22.86,43.078 v1(22.758,43.078) ; C42.1@23.647,74.219 23.647,75.667 v1(23.673,75.692) ; v1(27.102,79.756) C43.1@28.626,79.756 ; C51.1@27.635,74.193 27.534,74.295 v1(27.534,75.743) C50.1@28.677,75.743 ; C44.2@27.762,82.144 28.473,82.855 C34.1@28.473,84.734 28.473,85.928 v1(29.159,86.614) 29.235,86.614 C52.1@30.455,87.833 ; v1(28.6,92.1) 36.3,99.8 78.657,99.8 SW1.14@83.07,104.213 ; J5.168@53.744,11.044 53.744,12.139 v1(54.458,12.852) 55.245,12.852 55.713,12.385 J5.156@55.713,11.729 ; v1(58.776,12.903) 58.888,12.791 J5.146@58.888,11.729 ; v1(62.052,13.157) 62.063,13.147 J5.136@62.063,11.729 ; v1(65.227,13.157) 65.238,13.147 J5.126@65.238,11.729 ; v1(67.132,13.208) 67.143,13.198 J5.120@67.143,11.729 ; J5.116@68.413,11.729 v1(68.413,13.244) ; v1(71.577,13.132) v1@71.588,13.121 ; J5.106@71.588,11.729 v1@71.588,13.121 ; J5.166@72.54,11.044 72.54,12.169 v1@71.588,13.121 ; J5.164@75.08,11.044 75.08,12.24 v1(75.692,12.852) 76.581,12.852 77.053,12.381 J5.104@77.053,11.729 ; J5.98@78.958,11.729 78.958,12.892 79.502,13.437 v1(80.975,13.437) 81.001,13.437 80.228,12.664 J5.94@80.228,11.729 ; J5.84@83.403,11.729 v1(83.403,13.194) ; v1(86.563,13.132) 86.578,13.117 J5.74@86.578,11.729 ; v1(89.738,13.056) 89.738,11.744 J5.64@89.753,11.729 ; J5.54@92.928,11.729 92.928,12.359 93.345,12.776 93.878,12.776 ; J5.162@93.876,11.044 93.876,12.774 93.878,12.776 ; J5.160@96.416,11.044 96.416,12.753 ; J5.52@98.397,11.756 98.397,12.347 97.968,12.776 v1(95.656,12.776) 93.878,12.776 ; J5.42@101.572,11.756 101.572,13.155 v1(101.575,13.157) ; v1(104.724,13.233) 104.747,13.21 J5.32@104.747,11.756 ; J5.22@107.922,11.756 107.922,13.18 v1(107.925,13.183) ; J5.12@111.097,11.756 111.097,12.952 v1(111.303,13.157) ; J5.2@114.272,11.756 114.272,12.393 114.704,12.825 v1@115.212,12.825 ; J5.158@115.212,11.044 v1@115.212,12.825 ; v1(127.508,13.106) 123.911,13.106 123.543,13.475 115.862,13.475 v1(115.214,12.827) v1@115.212,12.825
  Bottom Layer (.GBL) w0.635: J5.PC08@48.311,11.502 49.221,11.502 v1(49.276,11.557)
  other v1: 67.132,13.208
MON_CCD1: R10A.1 R11A.2 U9.33 | length 51.7
  Top Layer (.GTL) w0.254: U9.33@31.375,45.56 37.295,45.56 43.688,39.167 43.688,35.966 45.034,34.62 45.034,29.42 44.983,29.369 v1(44.983,21.209) ; v1(52.324,18.542) 53.942,18.542 53.984,18.499 56.136,18.499 R11A.2@57,19.363 ; R10A.1@56.898,23.859 R10A.1@56.949,23.808 ; R10A.1@56.949,23.859 R10A.1@56.949,23.808 ; R11A.2@57,19.304 57,23.757 R10A.1@56.949,23.808
  MidLayer1 (.G1) w0.254: v1(44.983,21.209) 44.983,21.057 47.447,18.593 52.273,18.593 v1(52.324,18.542)
MON_CCD2: R10B.1 R11B.2 U9.34 | length 75.2
  Top Layer (.GTL) w0.254: U9.34@31.375,46.06 37.384,46.06 44.145,39.299 44.145,36.093 45.669,34.569 v1(45.669,32.433) ; v1(83.49,17.983) 83.49,19.253 R11B.2@83.6,19.363 83.6,23.757 R10B.1@83.549,23.808 ; R10B.1@83.498,23.859 R10B.1@83.549,23.808 ; R10B.1@83.549,23.859 R10B.1@83.549,23.808
  MidLayer1 (.G1) w0.254: v1(45.669,32.433) 63.607,32.433 64.981,31.06 72.796,31.06 78.19,25.666 78.19,21.641 81.847,17.983 v1(83.49,17.983)
MON_CCD3: R10C.1 R11C.2 U9.36 | length 102.7
  Top Layer (.GTL) w0.254: U9.36@31.375,47.06 36.887,47.06 44.552,39.395 44.552,36.627 v1(45.644,35.535) ; R10C.1@110.198,23.859 R10C.1@110.249,23.808 ; R10C.1@110.249,23.859 R10C.1@110.249,23.808 ; v1(111.379,17.78) 111.379,18.161 110.3,19.24 R11C.2@110.3,19.363 110.3,23.757 R10C.1@110.249,23.808
  MidLayer1 (.G1) w0.254: v1(45.644,35.535) 53.46,35.535 54.544,34.451 97.252,34.451 106.16,25.543 106.16,21.555 109.935,17.78 v1(111.379,17.78)
MON_CCD4: R10D.1 R11D.2 U9.37 | length 130.7
  Top Layer (.GTL) w0.254: U9.37@30.55,47.885 30.55,48.838 31.572,49.86 34.646,49.86 v1(45.364,39.141) ; R10D.1@136.398,23.859 R10D.1@136.449,23.808 ; R10D.1@136.449,23.859 R10D.1@136.449,23.808 ; v1(136.525,17.526) 136.5,17.551 R11D.2@136.5,19.363 136.5,23.757 R10D.1@136.449,23.808
  MidLayer1 (.G1) w0.254: v1(45.364,39.141) 49.482,39.141 50.879,37.745 50.879,36.529 51.459,35.949 121.953,35.949 131.826,26.077 131.826,21.234 135.534,17.526 v1(136.525,17.526)
MUX: P1.11 U14.14 | length 16.5
  Top Layer (.GTL) w0.254: P1.11@2.54,71.12 3.519,72.099 3.519,73.985 4.399,74.866 5.633,74.866 6.414,75.647 6.414,77.182 7.125,77.893 7.125,77.924 11.452,82.25 U14.14@12.375,82.25
NetC1A_1: C1A.1 C6A.2 R1A.1 R2A.1 TP1A.1 U1A.6 | length 53.2
  Top Layer (.GTL) w0.254: v1(46.84,20.176) 46.84,36.889 R1A.1@46.789,36.94 47.928,36.94 48.919,35.949 49.74,35.949 50.879,37.088 50.879,37.35 51.459,37.93 53.084,37.93 56.035,40.882 56.035,43.282 56.548,43.795 U1A.6@56.548,46.752 56.548,47.4 56.961,47.813 57.913,47.813 60.45,50.351 60.861,50.351 C1A.1@61.953,51.443 62.817,52.307 62.817,54.853 C6A.2@61.699,55.97 ; 62.893,52.383 TP1A.1@64.493,52.383
  Bottom Layer (.GBL) w0.254: v1@46.821,20.169 R2A.1@50.581,20.169
NetC1A_2: C1A.2 Q10A.2 R3A.2 U1A.2 | length 11.9
  Top Layer (.GTL) w0.254: Q10A.2@56.822,57.869 57.195,57.869 58.676,56.388 58.676,53.78 ; U1A.2@57.198,50.902 57.198,52.302 58.676,53.78 ; C1A.2@61.953,53.729 59.972,53.729 59.921,53.78 58.676,53.78
NetC1B_1: C1B.1 C6B.2 R1B.1 R2B.1 TP1B.1 U1B.6 | length 53.2
  Top Layer (.GTL) w0.254: v1(73.44,20.176) 73.44,36.889 R1B.1@73.389,36.94 74.528,36.94 75.519,35.949 76.34,35.949 77.479,37.088 77.479,37.35 78.059,37.93 79.684,37.93 82.635,40.882 82.635,43.282 83.148,43.795 U1B.6@83.148,46.752 83.148,47.4 83.561,47.813 84.513,47.813 87.05,50.351 87.461,50.351 C1B.1@88.553,51.443 89.417,52.307 89.417,54.853 C6B.2@88.299,55.97 ; 89.493,52.383 TP1B.1@91.093,52.383
  Bottom Layer (.GBL) w0.254: v1@73.421,20.169 R2B.1@77.181,20.169
NetC1B_2: C1B.2 Q10B.2 R3B.2 U1B.2 | length 11.9
  Top Layer (.GTL) w0.254: Q10B.2@83.422,57.869 83.795,57.869 85.276,56.388 85.276,53.78 ; U1B.2@83.798,50.902 83.798,52.302 85.276,53.78 ; C1B.2@88.553,53.729 86.572,53.729 86.521,53.78 85.276,53.78
NetC1C_1: C1C.1 C6C.2 R1C.1 R2C.1 TP1C.1 U1C.6 | length 53.2
  Top Layer (.GTL) w0.254: v1(100.14,20.176) 100.14,36.889 R1C.1@100.089,36.94 101.228,36.94 102.219,35.949 103.04,35.949 104.179,37.088 104.179,37.35 104.759,37.93 106.384,37.93 109.335,40.882 109.335,43.282 109.848,43.795 U1C.6@109.848,46.752 109.848,47.4 110.261,47.813 111.213,47.813 113.75,50.351 114.161,50.351 C1C.1@115.253,51.443 116.117,52.307 116.117,54.853 C6C.2@114.999,55.97 ; 116.193,52.383 TP1C.1@117.793,52.383
  Bottom Layer (.GBL) w0.254: v1@100.121,20.169 R2C.1@103.881,20.169
NetC1C_2: C1C.2 Q10C.2 R3C.2 U1C.2 | length 11.9
  Top Layer (.GTL) w0.254: Q10C.2@110.122,57.869 110.495,57.869 111.976,56.388 111.976,53.78 ; U1C.2@110.498,50.902 110.498,52.302 111.976,53.78 ; C1C.2@115.253,53.729 113.272,53.729 113.221,53.78 111.976,53.78
NetC1D_1: C1D.1 C6D.2 R1D.1 R2D.1 TP1D.1 U1D.6 | length 53.2
  Top Layer (.GTL) w0.254: v1(126.34,20.176) 126.34,36.889 R1D.1@126.289,36.94 127.428,36.94 128.419,35.949 129.24,35.949 130.379,37.088 130.379,37.35 130.959,37.93 132.584,37.93 135.535,40.882 135.535,43.282 136.048,43.795 U1D.6@136.048,46.752 136.048,47.4 136.461,47.813 137.413,47.813 139.95,50.351 140.361,50.351 C1D.1@141.453,51.443 142.317,52.307 142.317,54.853 C6D.2@141.199,55.97 ; 142.393,52.383 TP1D.1@143.993,52.383
  Bottom Layer (.GBL) w0.254: v1@126.321,20.169 R2D.1@130.081,20.169
NetC1D_2: C1D.2 Q10D.2 R3D.2 U1D.2 | length 11.9
  Top Layer (.GTL) w0.254: Q10D.2@136.322,57.869 136.695,57.869 138.176,56.388 138.176,53.78 ; U1D.2@136.698,50.902 136.698,52.302 138.176,53.78 ; C1D.2@141.453,53.729 139.472,53.729 139.421,53.78 138.176,53.78
NetC6A_1: C6A.1 Q10A.7 U2A.6 | length 23.8
  Top Layer (.GTL) w0.254: v1(59.179,59.87) C6A.1@61.699,59.87 ; v1(61.166,45.906) 61.572,45.5 U2A.6@61.572,43.583
  MidLayer1 (.G1) w0.254: Q10A.7@55.349,54.44 55.356,54.434 57.743,54.434 58.472,55.162 ; v1@59.115,59.844 59.115,55.805 58.472,55.162 ; v1@61.147,45.899 61.147,52.487 58.472,55.162
NetC6B_1: C6B.1 Q10B.7 U2B.6 | length 23.8
  Top Layer (.GTL) w0.254: v1(85.779,59.87) C6B.1@88.299,59.87 ; v1(87.766,45.906) 88.172,45.5 U2B.6@88.172,43.583
  MidLayer1 (.G1) w0.254: Q10B.7@81.949,54.44 81.956,54.434 84.343,54.434 85.072,55.162 ; v1@85.715,59.844 85.715,55.805 85.072,55.162 ; v1@87.747,45.899 87.747,52.487 85.072,55.162
NetC6C_1: C6C.1 Q10C.7 U2C.6 | length 23.8
  Top Layer (.GTL) w0.254: v1(112.479,59.87) C6C.1@114.999,59.87 ; v1(114.466,45.906) 114.872,45.5 U2C.6@114.872,43.583
  MidLayer1 (.G1) w0.254: Q10C.7@108.649,54.44 108.656,54.434 111.043,54.434 111.772,55.162 ; v1@112.415,59.844 112.415,55.805 111.772,55.162 ; v1@114.447,45.899 114.447,52.487 111.772,55.162
NetC6D_1: C6D.1 Q10D.7 U2D.6 | length 23.8
  Top Layer (.GTL) w0.254: v1(138.679,59.87) C6D.1@141.199,59.87 ; v1(140.666,45.906) 141.072,45.5 U2D.6@141.072,43.583
  MidLayer1 (.G1) w0.254: Q10D.7@134.849,54.44 134.856,54.434 137.243,54.434 137.972,55.162 ; v1@138.615,59.844 138.615,55.805 137.972,55.162 ; v1@140.647,45.899 140.647,52.487 137.972,55.162
NetC8A_2: C8A.2 Q10A.6 R4A.2 U1A.3 | length 9.1
  Top Layer (.GTL) w0.254: C8A.2@52.301,50.986 R4A.2@54.079,50.986 55.574,52.481 55.617,52.481 ; Q10A.6@53.927,55.025 53.927,54.172 55.617,52.481 ; U1A.3@56.548,50.902 56.327,51.123 56.327,51.772 55.617,52.481
NetC8B_2: C8B.2 Q10B.6 R4B.2 U1B.3 | length 9.1
  Top Layer (.GTL) w0.254: C8B.2@78.901,50.986 R4B.2@80.679,50.986 82.174,52.481 82.217,52.481 ; Q10B.6@80.527,55.025 80.527,54.172 82.217,52.481 ; U1B.3@83.148,50.902 82.927,51.123 82.927,51.772 82.217,52.481
NetC8C_2: C8C.2 Q10C.6 R4C.2 U1C.3 | length 9.1
  Top Layer (.GTL) w0.254: C8C.2@105.601,50.986 R4C.2@107.379,50.986 108.874,52.481 108.917,52.481 ; Q10C.6@107.227,55.025 107.227,54.172 108.917,52.481 ; U1C.3@109.848,50.902 109.627,51.123 109.627,51.772 108.917,52.481
NetC8D_2: C8D.2 Q10D.6 R4D.2 U1D.3 | length 9.1
  Top Layer (.GTL) w0.254: C8D.2@131.801,50.986 R4D.2@133.579,50.986 135.074,52.481 135.117,52.481 ; Q10D.6@133.427,55.025 133.427,54.172 135.117,52.481 ; U1D.3@136.048,50.902 135.827,51.123 135.827,51.772 135.117,52.481
NetC9A_1: C9A.1 C10A.POS L1A.1 U5A.7 | length 10.5
  Top Layer (.GTL) w0.254: U5A.7@58.516,37.265 58.562,37.219 61.242,37.219 v1(61.496,36.965)
  MidLayer1 (.G1) w0.254: v1@61.477,36.958 61.503,36.958 v1@61.477,36.958
  Bottom Layer (.GBL) w0.254: L1A.1@58.328,33.631 58.328,34.901 C9A.1@60.487,37.06 60.588,36.958 61.477,36.958 61.503,36.958 62.874,36.958 C10A.POS@63.281,36.552
NetC9B_1: C9B.1 C10B.POS L1B.1 U5B.7 | length 10.5
  Top Layer (.GTL) w0.254: U5B.7@85.116,37.265 85.162,37.219 87.842,37.219 v1(88.096,36.965)
  MidLayer1 (.G1) w0.254: v1@88.077,36.958 88.103,36.958 v1@88.077,36.958
  Bottom Layer (.GBL) w0.254: L1B.1@84.928,33.631 84.928,34.901 C9B.1@87.087,37.06 87.188,36.958 88.077,36.958 88.103,36.958 89.474,36.958 C10B.POS@89.881,36.552
NetC9C_1: C9C.1 C10C.POS L1C.1 U5C.7 | length 10.5
  Top Layer (.GTL) w0.254: U5C.7@111.816,37.265 111.862,37.219 114.542,37.219 v1(114.796,36.965)
  MidLayer1 (.G1) w0.254: v1@114.777,36.958 114.803,36.958 v1@114.777,36.958
  Bottom Layer (.GBL) w0.254: L1C.1@111.628,33.631 111.628,34.901 C9C.1@113.787,37.06 113.888,36.958 114.777,36.958 114.803,36.958 116.174,36.958 C10C.POS@116.581,36.552
NetC9D_1: C9D.1 C10D.POS L1D.1 U5D.7 | length 10.5
  Top Layer (.GTL) w0.254: U5D.7@138.016,37.265 138.062,37.219 140.742,37.219 v1(140.996,36.965)
  MidLayer1 (.G1) w0.254: v1@140.977,36.958 141.003,36.958 v1@140.977,36.958
  Bottom Layer (.GBL) w0.254: L1D.1@137.828,33.631 137.828,34.901 C9D.1@139.987,37.06 140.088,36.958 140.977,36.958 141.003,36.958 142.374,36.958 C10D.POS@142.781,36.552
NetC12A_2: C12A.2 R10A.2 R13A.2 U3A.14 | length 6
  Top Layer (.GTL) w0.254: R13A.2@53.393,25.383 53.469,25.459 54.485,25.459 C12A.2@55.171,26.145 ; U3A.14@55.247,28.244 55.247,26.272 55.12,26.145 C12A.2@55.171,26.145 ; R10A.2@56.898,26.145 C12A.2@55.171,26.145
NetC12B_2: C12B.2 R10B.2 R13B.2 U3B.14 | length 6
  Top Layer (.GTL) w0.254: R13B.2@79.993,25.383 80.069,25.459 81.085,25.459 C12B.2@81.771,26.145 ; U3B.14@81.847,28.244 81.847,26.272 81.72,26.145 C12B.2@81.771,26.145 ; R10B.2@83.498,26.145 C12B.2@81.771,26.145
NetC12C_2: C12C.2 R10C.2 R13C.2 U3C.14 | length 6
  Top Layer (.GTL) w0.254: R13C.2@106.693,25.383 106.769,25.459 107.785,25.459 C12C.2@108.471,26.145 ; U3C.14@108.547,28.244 108.547,26.272 108.42,26.145 C12C.2@108.471,26.145 ; R10C.2@110.198,26.145 C12C.2@108.471,26.145
NetC12D_2: C12D.2 R10D.2 R13D.2 U3D.14 | length 6
  Top Layer (.GTL) w0.254: R13D.2@132.893,25.383 132.969,25.459 133.985,25.459 C12D.2@134.671,26.145 ; U3D.14@134.747,28.244 134.747,26.272 134.62,26.145 C12D.2@134.671,26.145 ; R10D.2@136.398,26.145 C12D.2@134.671,26.145
NetC13A_2: C13A.2 C15A.2 L2A.1 U5A.4 | length 11.1
  Top Layer (.GTL) w0.254: U5A.4@54.366,35.965 54.366,35.383 v1(54.409,35.34)
  Bottom Layer (.GBL) w0.254: C13A.2@52.105,41.632 52.105,41.708 53.298,42.902 54.391,42.902 v1@54.391,35.333
NetC13B_2: C13B.2 C15B.2 L2B.1 U5B.4 | length 11.1
  Top Layer (.GTL) w0.254: U5B.4@80.966,35.965 80.966,35.383 v1(81.009,35.34)
  Bottom Layer (.GBL) w0.254: C13B.2@78.705,41.632 78.705,41.708 79.898,42.902 80.991,42.902 v1@80.991,35.333
NetC13C_2: C13C.2 C15C.2 L2C.1 U5C.4 | length 11.1
  Top Layer (.GTL) w0.254: U5C.4@107.666,35.965 107.666,35.383 v1(107.709,35.34)
  Bottom Layer (.GBL) w0.254: C13C.2@105.405,41.632 105.405,41.708 106.598,42.902 107.691,42.902 v1@107.691,35.333